# Altium PCB FM007.PcbDoc
Units mm, origin at the board's own origin, x right, y up, seen from the top; angles counter-clockwise.
Board outline 20 x 20 mm, 2 copper layers (Top Layer, Bottom Layer); 25 components, 13 nets, 58 pads, 43 vias.
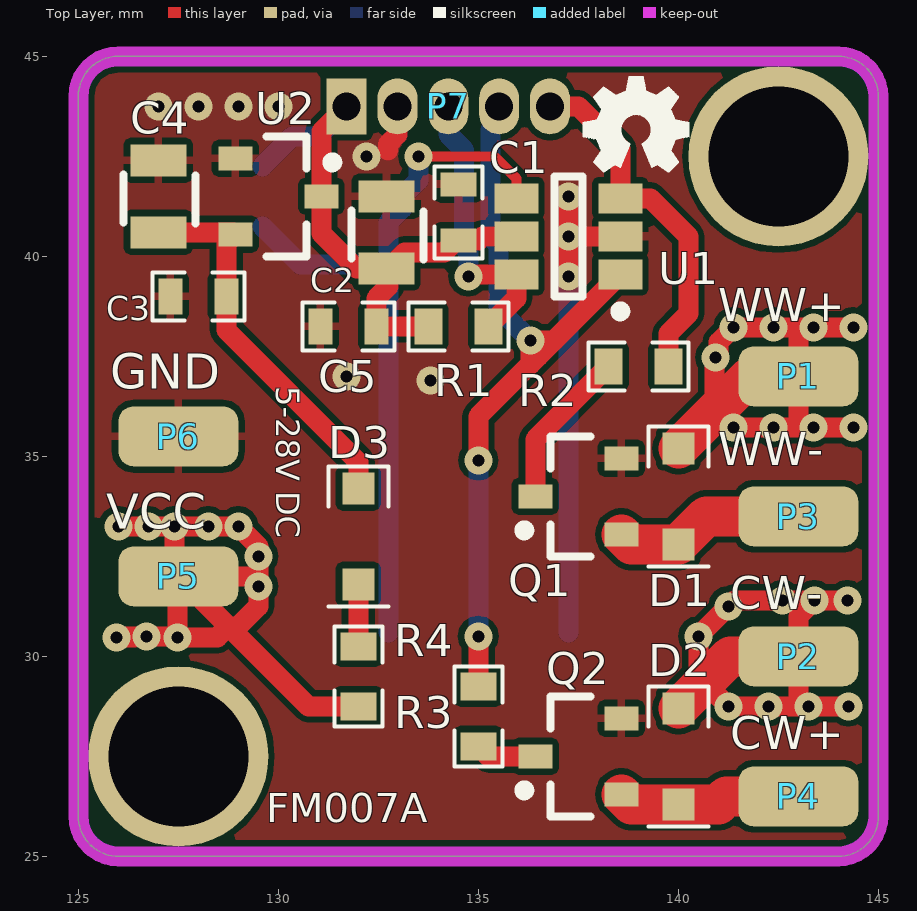
[diagram p0: Top Layer view]
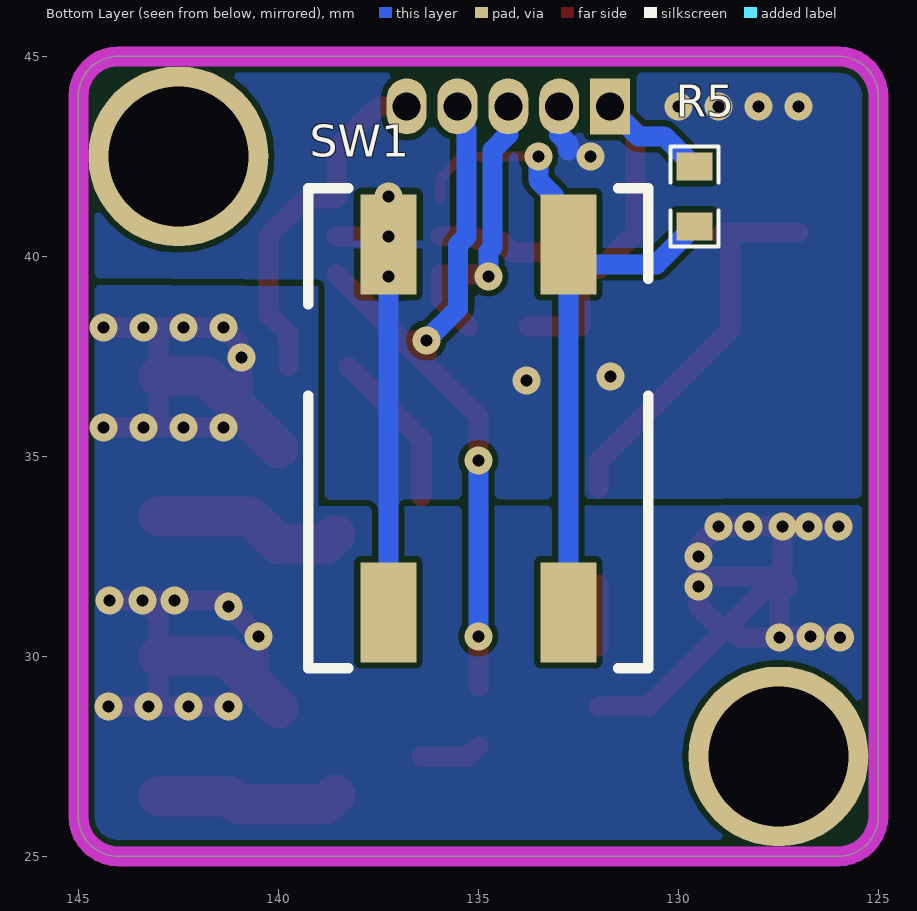
[diagram p1: Bottom Layer view, seen from below]
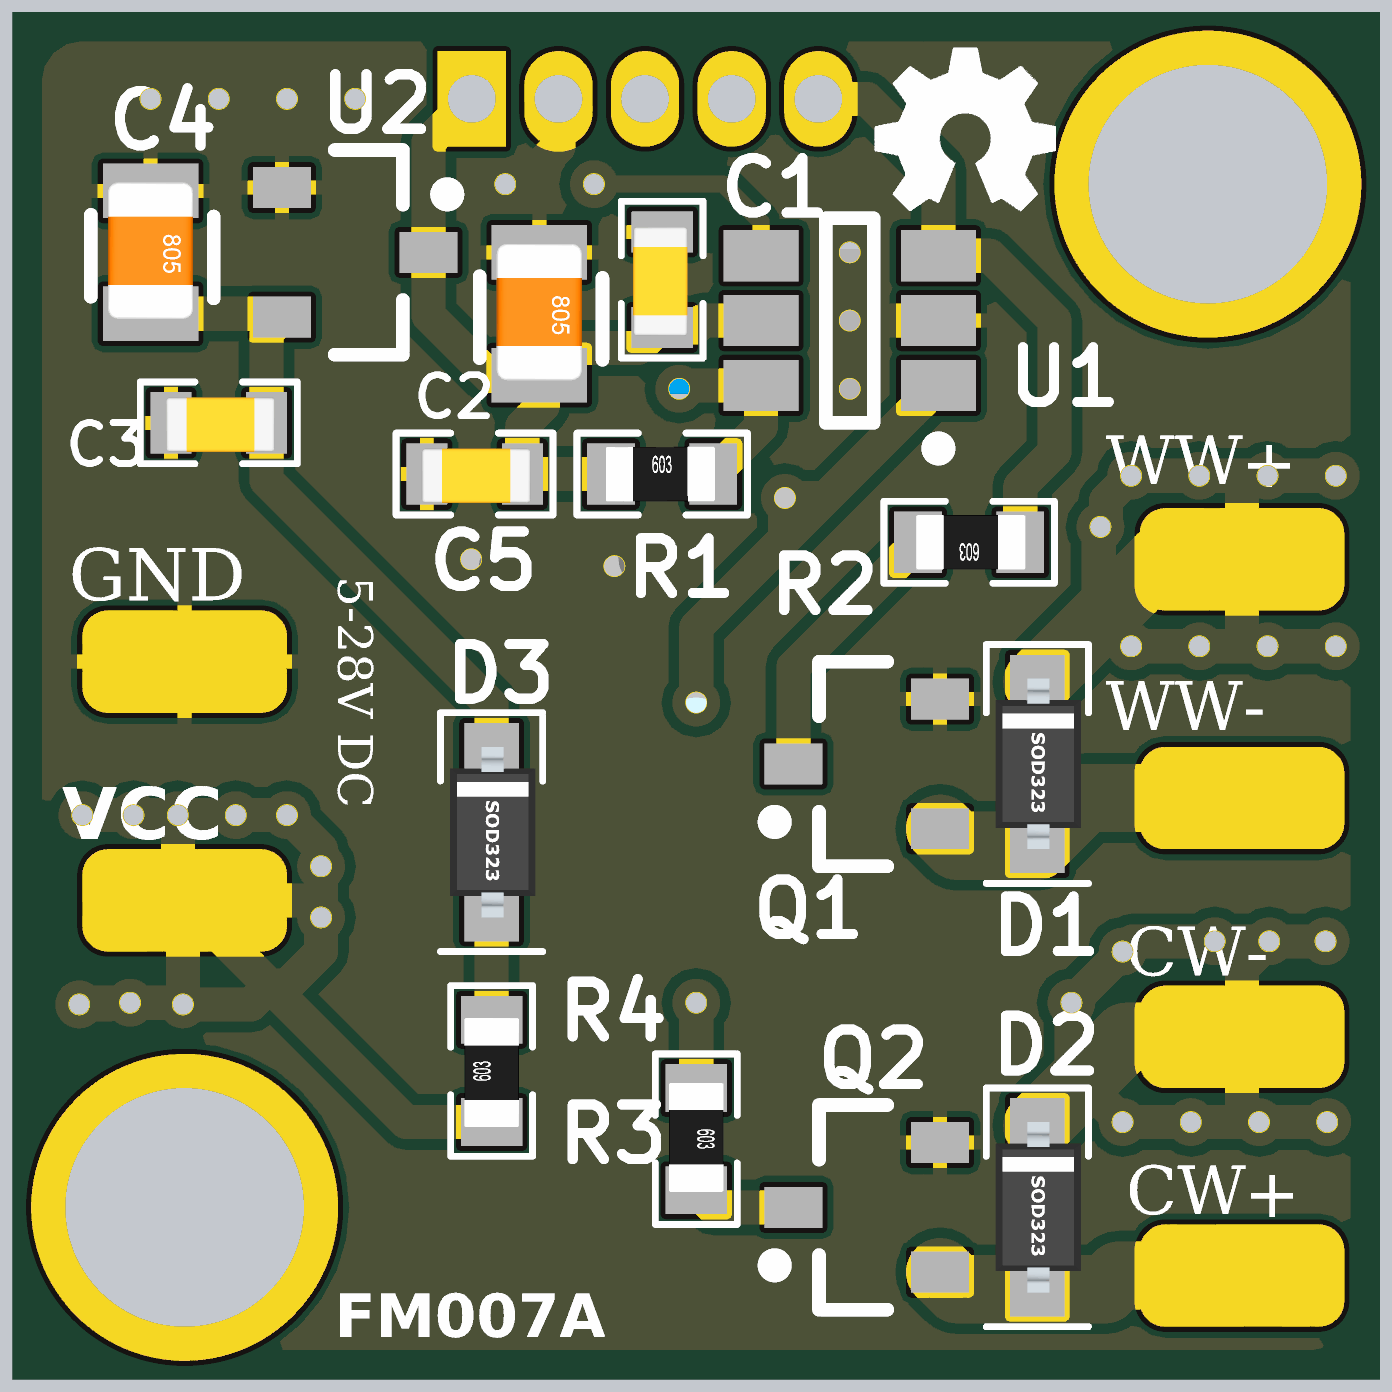
[diagram p2: 3D render of the assembled board from above, using the file's embedded part models]

## Layer stack, top to bottom
Top Solder: solder mask 0.0102, Solder Resist, Dk 3.5
Top Layer: signal copper 0.0356
Dielectric 1: dielectric 0.32, FR-4, Dk 4.8
Bottom Layer: signal copper 0.0356
Bottom Solder: solder mask 0.0102, Solder Resist, Dk 3.5

## Board outline
125,26 125,44 cw(c126,44) 126,45 144,45 cw(c144,44) 145,44 145,26 cw(c144,26) 144,25 126,25 cw(c126,26)

## Design rules (kind name [scope] priority, off if disabled: settings)
BoardOutlineClearance [All] p1: gap=0.381 ignorepadtopadclearanceinfootprint=FALSE
Clearance [All] p1: gap=0.152 ignorepadtopadclearanceinfootprint=FALSE except(0: Arc-Hole Track-Hole SMDPad-Hole THPad-Hole Via-Hole Fill-Hole Poly-Hole Region-Hole Text-Hole)
ComponentClearance [All] p1: gap=0.025 collisioncheckmode=3 verticalgap=0.025 showdistances=FALSE
DiffPairsRouting [All] p1: maxlimit=10 minlimit=0.152 mostfreqgap=0.203 toplayer_minwidth=0.152 toplayer_maxwidth=0.381 toplayer_prefwidth=0.203 bottomlayer_minwidth=0.152 bottomlayer_maxwidth=0.381 bottomlayer_prefwidth=0.203 maxuncoupledlength=12.7
HoleSize [All] p1: absolutevalues=TRUE maxlimit=6.731 minlimit=0.33 maxpercent=80.000 minpercent=20.000
HoleToHoleClearance [All] p1: gap=0.254 allowstackedmicrovias=FALSE
MinimumAnnularRing [All] p1: minimumring=0.178
MinimumSolderMaskSliver [All] p1: minsoldermaskwidth=0
PlaneClearance [All] p1: clearance=0.254
PlaneConnect [All] p1: planeconnectstyle=Direct reliefexpansion=0.406 reliefentries=4 reliefconductorwidth=0.152 reliefairgap=0.152
PolygonConnect PolygonConnect_2 [InNet('VCC') vs isVia] p1: connectstyle=Direct reliefconductorwidth=0.254 reliefentries=4 polygonreliefangle="90 Angle" airgapwidth=0.254
PolygonConnect PolygonConnect_1 [InNet('GND') vs IsVia] p2: connectstyle=Direct reliefconductorwidth=0.254 reliefentries=4 polygonreliefangle="90 Angle" airgapwidth=0.254
PolygonConnect [All] p3: connectstyle=Relief reliefconductorwidth=0.203 reliefentries=4 polygonreliefangle="90 Angle" airgapwidth=0.152
RoutingCorners [All] p1: cornerstyle=45-Degree minsetback=1.25 maxsetback=1.25
RoutingVias [All] p1: holewidth=0.381 width=0.762 viastyle="Through Hole" minholewidth=0.33 minwidth=0.686 maxholewidth=2.54 maxwidth=2.896
SilkToSilkClearance [All] p1: silktosilkclearance=0
SilkToSolderMaskClearance [IsPad] p1: minsilkscreentomaskgap=0.152 clearancetoexposedcopper=TRUE
SolderMaskExpansion [All] p1: expansion=0.075
Width [All] p1: maxlimit=10.16 minlimit=0.152 preferedwidth=0.203
20 further rules are at their usual default settings.

## Components (designator, comment, footprint, x,y, rotation, side; value= is the part's Value field where it differs from the comment)
C1 "100nF" CAP0603L 134.5,41.1 r270 top
C2 "10uF" CAP0805L 132.7,40.6 r270 top
C3 "100nF" CAP0603L 128,39 r0 top
C4 "1uF" CAP0805L 127,41.5 r270 top
C5 "100nF" CAP0603L 131.75,38.25 r0 top
D1 "D Schottky" SOD-323 140,34 r90 top
D2 "D Schottky" SOD-323 140,27.5 r90 top
D3 "D Schottky" SOD-323 132,33 r90 top
P1 "WW+" "Solder PAD SMD 1530" 143,37 r0 top
P2 "CW-" "Solder PAD SMD 1530" 143,30 r0 top
P3 "WW-" "Solder PAD SMD 1530" 143,33.5 r0 top
P4 "CW+" "Solder PAD SMD 1530" 143,26.5 r0 top
P5 "VCC" "Solder PAD SMD 1530" 127.5,32 r0 top
P6 "GND" "Solder PAD SMD 1530" 127.5,35.5 r0 top
P7 "" "5x1.27mm Header" 131.71,43.75 r0 top
Q1 "IRLML6344" SOT23_L 137.5,34 r180 top
Q2 "IRLML6344" SOT23_L 137.5,27.5 r180 top
R1 "10k" RES0603L 134.5,38.25 r0 top
R2 "0R" RES0603L 139,37.25 r180 top
R3 "0R" RES0603L 135,28.5 r270 top
R4 "10R" RES0603L 132,29.5 r90 top
R5 "10k" RES0603L 129.6,41.5 r90 bottom
SW1 "" "Rafi 1.14.100.503/0000" 135,35.7 r270 bottom
U1 "Attiny10" SOT95P280X100-6N 137.25,40.5 r180 top
U2 "LM3480/TLV760" SOT23_L 130,41.5 r0 top

## Footprints (in the part's own frame and the unit in brackets; to place one, negate y for a bottom-side part, rotate by r counter-clockwise, add the part's x,y. Pads: shape width x height; smd on the part's side, far side on the other; paste and mask are expansions set on the pad)
"5x1.27mm Header" [mm]
  rect 1x1.4 hole 0.7: 1(0,0)
  oval 1x1.4 hole 0.7: 2(1.27,0) 3(2.54,0) 4(3.81,0) 5(5.08,0)
CAP0603L [mm]
  rect 0.6x0.9 smd: 1(-0.7,0) 2(0.7,0)
  silkscreen extent -1.15,-0.6 1.15,0.6, body extent -0.77,-0.43 0.83,0.37, height 0.86
CAP0805L [mm]
  rect 0.8x1.4 smd: 1(-0.9,0) 2(0.9,0)
  silkscreen extent -0.55,-0.87 0.67,0.92, body extent -1.03,-0.63 0.97,0.63, height 0.78
"Rafi 1.14.100.503/0000" [mm] "1.14.100.503/0000 RACON 8 - Short-travel keyswitch, SMT gullwing (Z) terminals"
  rect 2.5x1.4 smd: 1(-4.6,2.25) 2(4.6,2.25) 3(4.6,-2.25) 4(-4.6,-2.25)
  silkscreen extent -6,-4.25 6,4.25, body extent -5.52,-4.2 5.52,4.2, height 5.04
RES0603L [mm]
  rect 0.7x0.9 smd: 1(-0.75,0) 2(0.75,0)
  silkscreen extent -1.25,-0.6 1.25,0.6, body extent -0.83,-0.4 0.77,0.4, height 0.3
SOD-323 [mm] "SOD-323"
  rect 0.8x0.8 smd: 1(-1.2,0) 2(1.2,0)
  silkscreen extent -1.75,-0.75 1.75,0.75, body extent -1.25,-0.64 1.25,0.61, height 0.95
"Solder PAD SMD 1530" [mm] "Solder PAD SMD  1.5x3mm"
  rrect50% 3x1.5 smd paste-1.5: 1(0,0)
  body extent -1.48,-0.76 1.53,0.75, height 0.01
SOT23_L [mm] "SOT23, 3-Leads, Body 2.9x1.3mm, Pitch 0.95mm, Lead Span 2.3mm - Reverse Pinning, IPC High Density"
  rect 0.85x0.6 smd: 1(1.075,0) 2(-1.075,-0.95) 3(-1.075,0.95)
  silkscreen extent -0.3,-1.5 1.47,1.5, body extent -0.7,-1.5 0.7,1.5, height 1.1
SOT95P280X100-6N [mm] "SOT23, 6-Leads, Body 2.95x2.80mm, Pitch 0.95mm, IPC Medium Density"
  rect 1.1x0.75 smd: 1(-1.3,0.95) 2(-1.3,0) 3(-1.3,-0.95) 4(1.3,-0.95) 5(1.3,0) 6(1.3,0.95)
  silkscreen extent -1.43,-1.5 0.35,2, body extent -0.75,-1.5 0.75,1.5, height 1

## Part data
C1 C2 C3 C4 C5: library part "C niebiegunowe", "Capacitor (Semiconductor SIM Model)", LatestRevisionDate=29-May-2009, LatestRevisionNote="IPC-7351 Footprint Added.", PackageDescription="Chip Capacitor", PackageReference=C1206, Published=8-Jun-2000, Publisher="Altium Limited"
D1 D2 D3: "Schottky Diode", Code_JEDEC=DO-214-AA, LatestRevisionDate=17-Jul-2002, LatestRevisionNote="Re-released for DXP Platform.", PackageReference=SMB, Published=8-Jun-2000, Publisher="Altium Limited"
P1 P2 P3 P4 P5 P6: library part "Solder PAD"
P7: library part "Header 5"
Q1 Q2: library part MOSFET
R1 R2 R3 R4 R5: library part R, "Semiconductor Resistor", LatestRevisionDate=17-Jul-2002, LatestRevisionNote="Re-released for DXP Platform.", PackageReference=AXIAL-0.5, Published=8-Jun-2000, Publisher="Altium Limited"
SW1: library part "Tact Switch"

## Free pads (board coordinates)
  round 4.5 hole 3.5: 3(127.5,27.5) 3(142.5,42.5)

## Via types
v1: diameter 0.7, hole 0.3, Top Layer to Bottom Layer, tented both sides, 43 vias

## Nets (pads, with @x,y where several pads share a name; then routed paths per layer and width w, separated by ;. In a path a pad name is that pad's centre, name@x,y a point inside that pad or via, vN(x,y) a via of type N, cw(c..) or ccw(c..) an arc to the next point about the centre after c; other vN are vias at no path point)
+3V3: C1.2 C2.2 C5.2 P7.1 R1.1 R5.2 U1.5 U2.1 | length 14.6
  Top Layer w0.5: P7.1 131.075,43.115 U2.1 131.075,40.575 131.96,39.69 C2.2@132.75,39.69 ; R1.1 C5.2 132.45,38.95 132.75,39.25 C2.2@132.75,39.69 ; U1.5 135.1,40.5 135,40.4 134.45,40.4 134.15,40.1 133.16,40.1 C2.2@132.75,39.69
  Bottom Layer w0.5: R5.2 130.35,43 131,43 131.71,43.71 P7.1
CW+: D2.1 P4.1 Q2.3 | length 4.6
  Top Layer w1: Q2.3 138.825,26.3 D2.1 141,26.3 141.2,26.5 P4.1
GND: C1.1 C2.1 C3.1 C4.1 C5.1 P6.1 P7.2 Q1.2 Q2.2 SW1.3 SW1.4 U1.2 U2.3 | length 14.6
  Top Layer w0.5: 132.748,42.648 132.748,42.812 132.98,43.044 P7.2 ; v1(137.25,39.5) v1(137.25,40.5) ; v1(137.25,41.5) v1(137.25,40.5) ; U1.2 v1(137.25,40.5)
  Bottom Layer w0.5: 132.748,42.648 132.748,42.812 132.98,43.044 P7.2 ; SW1.3@137.25,30.6 SW1.3 v1(137.25,39.5)
  other v1: 133.8,36.9 131.7,37 132.2,42.5 127,43.75 128,43.75 129,43.75 130,43.75
NetC3_2: C3.2 C4.2 D3.2 U2.2 | length 9.8
  Top Layer w0.5: C4.2 128.875,40.6 U2.2 128.7,40.325 C3.2 128.7,38.159 132,34.859 D3.2
NetD3_1: D3.1 R4.2 | length 1.5
  Top Layer w0.5: R4.2 D3.1
NetQ1_1: Q1.1 R2.2 | length 4
  Top Layer w0.5: Q1.1 136.425,35.425 R2.2
NetQ2_1: Q2.1 R3.2 | length 1.5
  Top Layer w0.5: R3.2 135.25,27.5 Q2.1
PB0: P7.4 R3.1 U1.1 | length 19.6
  Top Layer w0.5: R3.1 v1(135,30.5) ; v1(135,34.9) 135,36 136.3,37.3 ; U1.1 136.9,37.9 ; 136.3,37.3 v1@136.3,37.7 ; 136.3,37.3 136.5,37.5 ; v1@136.3,37.7 136.5,37.5 ; v1@136.3,37.7 v1(136.3,37.9) 136.9,37.9 ; 136.5,37.5 136.9,37.9
  Bottom Layer w0.5: v1(135,30.5) v1(135,34.9) ; P7.4 135.52,43.387 135.3,43.167 135.3,40.491 135.502,40.288 135.502,38.697 v1(136.3,37.9)
PB1: P7.5 R2.1 U1.3 | length 9
  Top Layer w0.5: P7.5 137.5,43.75 138.55,42.7 U1.3 139.3,41.45 140.25,40.5 140.25,38.567 139.75,38.067 R2.1
PB2: R5.1 SW1.1 SW1.2 U1.4 | length 18.9
  Top Layer w0.25: v1(133.5,42.5) 135.4,42.5 135.95,41.95 U1.4
  Bottom Layer w0.5: R5.1 130.55,39.8 SW1.1@132.75,39.8 ; SW1.2@132.75,30.6 SW1.2 SW1.1@132.75,39.8 ; v1(133.5,42.5) 133.5,41.9 133.1,41.5 133.1,41.2 132.75,40.85 SW1.1 SW1.1@132.75,39.8
RESET: P7.3 R1.2 U1.6 | length 7.3
  Top Layer w0.5: v1(134.75,39.5) 134.8,39.55 U1.6 135.95,38.95 R1.2
  Bottom Layer w0.5: P7.3 134.25,43.05 134.648,42.652 134.648,40.221 134.75,40.118 v1(134.75,39.5)
VCC: D1.2 D2.2 P1.1 P2.1 P5.1 R4.1 | length 51.4
  Top Layer w0.5: v1(126,33.25) v1(126.75,33.25) v1(127.4,33.25) ; R4.1 130.75,28.75 128.75,30.75 ; v1(144.225,31.4) v1(143.4,31.4) ; v1@144.246,28.75 v1(143.25,28.75) ; v1(144.375,35.725) v1(143.375,35.725) 143,35.725 ; v1(144.375,38.225) v1(143.375,38.225) 142.9,38.225 ; v1@126.38,30.5 v1(126.7,30.5) v1@127.475,30.5 ; v1@126.38,30.5 126.405,30.475 v1(125.955,30.475) 125.98,30.5 v1@126.38,30.5 ; v1(127.4,33.25) 127.4,32.1 P5.1 ; v1(127.4,33.25) v1(128.25,33.25) v1(129,33.25) 129.5,32.75 v1(129.5,32.5) v1(129.5,31.75) ; v1(127.475,30.475) 128.475,30.475 128.75,30.75 ; v1(127.475,30.475) 127.5,30.5 v1@127.475,30.5 ; v1(127.475,30.475) v1@127.475,30.5 ; v1@127.475,30.5 127.475,31.525 127.25,31.75 P5.1 ; P5.1 129.25,32 v1(129.5,31.75) ; P5.1 128.75,30.75 ; 128.75,30.75 129,30.75 129.5,31.25 v1(129.5,31.75) ; 142.9,38.225 143,38.125 P1.1 143,35.725 ; 142.9,38.225 v1(142.375,38.225) v1(141.375,38.225) 141.004,37.854 141.004,37.438 140.9,37.334 140.9,36.2 140.95,36.15 v1(141.375,35.725) v1(142.375,35.725) 143,35.725 ; v1(143.25,28.75) 143,29 P2.1 143,31 v1(143.4,31.4) ; v1(143.25,28.75) v1(142.25,28.75) v1(141.25,28.75) 140.65,29.35 140.5,29.5 v1(140.5,30.5) v1(141.25,31.25) 141.4,31.4 v1(142.6,31.4) v1(143.4,31.4)
  Top Layer w1: D2.2 140.65,29.35 141.3,30 P2.1 ; D1.2 140.95,36.15 141.8,37 P1.1
  other v1: 144.25,28.75 140.925,37.475
WW-: D1.1 P3.1 Q1.3 | length 4.8
  Top Layer w1: Q1.3 138.825,32.8 D1.1 140.7,33.5 P3.1

## Polygon pours and split planes (outlines as drawn)
VCC on Bottom Layer "VCC" (solid, pour order 0): 125,25 125,33.787 139,33.75 139,39.25 145,39.287 145,25
GND on Bottom Layer "gnd_bot" (solid, pour order 2): 125,34.25 125,45 145,45 145,34.25
GND on Bottom Layer "gnd_top" (solid, remove dead copper, pour order 6): 125,25 145,25 145,45 125,45
GND on Top Layer "gnd_top" (solid, remove dead copper, pour order 8): 125,45 125,25 145,25 145,45

## Keep-outs
Keep-Out Layer:
  the board outline again, w0.5

## Silkscreen, mask and mechanical layers (free items; w line width, h text height)
Top Overlay:
  region: 3066 vertices and 0 holes, not listed, extent 137.613,42.099 140.276,44.5
  text "5-28V DC" at 129.75,36.75 h1 r270
  text "FM007A" at 129.7,25.6 h1.25
Mechanical 2:
  drawing of 586 lines, arcs and shapes, not listed
Mechanical 3:
  lines w0.013: 0.015,0.053 ccw(c0.015,0.053) 0.015,0.053 ; 0.015,0.053 0.015,0.061 ; 0.015,0.053 0.022,0.052 cw(c0.022,0.051) 0.023,0.051 0.025,0.045 cw(c0.025,0.045) 0.025,0.045 0.021,0.039 ccw(c0.021,0.039) 0.021,0.039 0.026,0.034 ; 0.015,0.061 ccw(c0.015,0.061) 0.015,0.061 ; 0.015,0.061 0.022,0.062 ; 0.022,0.062 ccw(c0.022,0.063) 0.023,0.062 ; 0.023,0.062 0.025,0.068 ; 0.025,0.068 ccw(c0.025,0.069) 0.025,0.069 ; 0.025,0.069 0.021,0.075 cw(c0.021,0.075) 0.021,0.075 0.026,0.08 ; 0.026,0.034 ccw(c0.026,0.034) 0.027,0.033 ; 0.027,0.033 0.033,0.037 ; 0.027,0.08 ccw(c0.026,0.08) 0.026,0.08 ; 0.027,0.08 0.033,0.076 ; 0.033,0.038 ccw(c0.033,0.037) 0.033,0.037 ; 0.033,0.038 0.036,0.036 ; 0.033,0.076 ccw(c0.033,0.077) 0.033,0.076 ; 0.033,0.076 0.039,0.079 ; 0.036,0.036 ccw(c0.036,0.037) 0.036,0.037 ; 0.036,0.037 0.041,0.049 ccw(c0.041,0.049) 0.041,0.049 cw(c0.044,0.057) 0.048,0.049 ccw(c0.048,0.049) 0.048,0.049 0.053,0.037 ; 0.039,0.079 ccw(c0.039,0.079) 0.039,0.079 ; 0.039,0.079 0.04,0.086 ; 0.041,0.086 ccw(c0.041,0.086) 0.04,0.086 ; 0.041,0.086 0.048,0.086 ; 0.048,0.086 ccw(c0.048,0.086) 0.048,0.086 ; 0.048,0.086 0.05,0.079 ; 0.05,0.079 ccw(c0.05,0.079) 0.05,0.079 ; 0.05,0.079 0.056,0.076 ; 0.053,0.037 ccw(c0.053,0.037) 0.053,0.036 ; 0.053,0.036 0.056,0.038 ; 0.056,0.037 ccw(c0.056,0.037) 0.056,0.038 ; 0.056,0.037 0.062,0.033 ; 0.056,0.076 ccw(c0.056,0.077) 0.056,0.076 ; 0.056,0.076 0.062,0.08 ; 0.062,0.033 ccw(c0.062,0.034) 0.063,0.034 ; 0.063,0.034 0.068,0.039 ccw(c0.068,0.039) 0.068,0.039 0.064,0.045 cw(c0.064,0.045) 0.064,0.045 0.066,0.051 cw(c0.067,0.051) 0.067,0.052 0.074,0.053 ; 0.063,0.08 ccw(c0.062,0.08) 0.062,0.08 ; 0.063,0.08 0.068,0.075 ; 0.064,0.069 ccw(c0.064,0.069) 0.064,0.068 ; 0.064,0.068 0.066,0.062 ; 0.064,0.069 0.068,0.075 ; 0.066,0.062 ccw(c0.067,0.063) 0.067,0.062 ; 0.067,0.062 0.074,0.061 ; 0.068,0.075 ccw(c0.068,0.075) 0.068,0.075 ; 0.074,0.053 ccw(c0.074,0.053) 0.074,0.053 ; 0.074,0.053 0.074,0.061 ; 0.074,0.061 ccw(c0.074,0.061) 0.074,0.061
Mechanical 4:
  drawing of 24 lines, arcs and shapes, not listed